# Altium PCB AVR最小系统板_电源线加粗.PcbDoc
Units mm, origin at the board's own origin, x right, y up, seen from the top; angles counter-clockwise.
Board outline 152.4 x 101.6 mm, 2 copper layers (Top Layer, Bottom Layer); 29 components, 54 nets, 170 pads, 0 vias.
Unrouted connection lines stored in the file: 1.
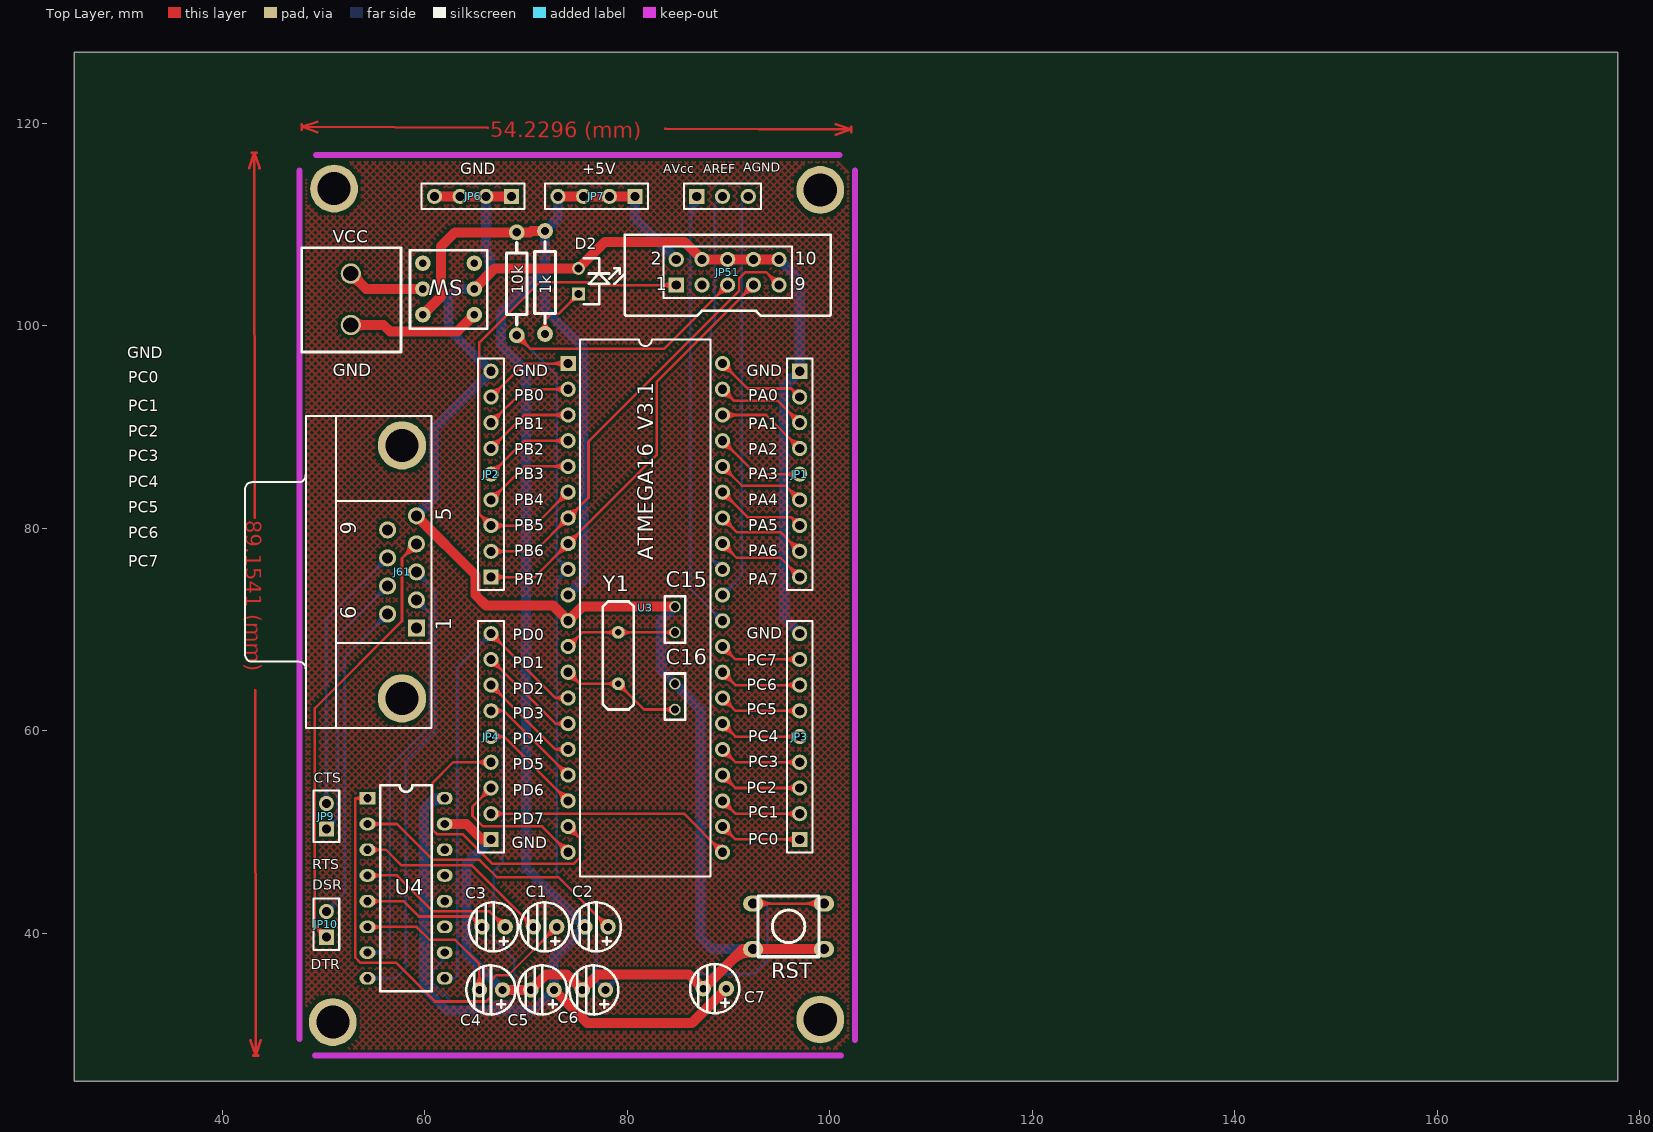
[diagram p0: Top Layer view]
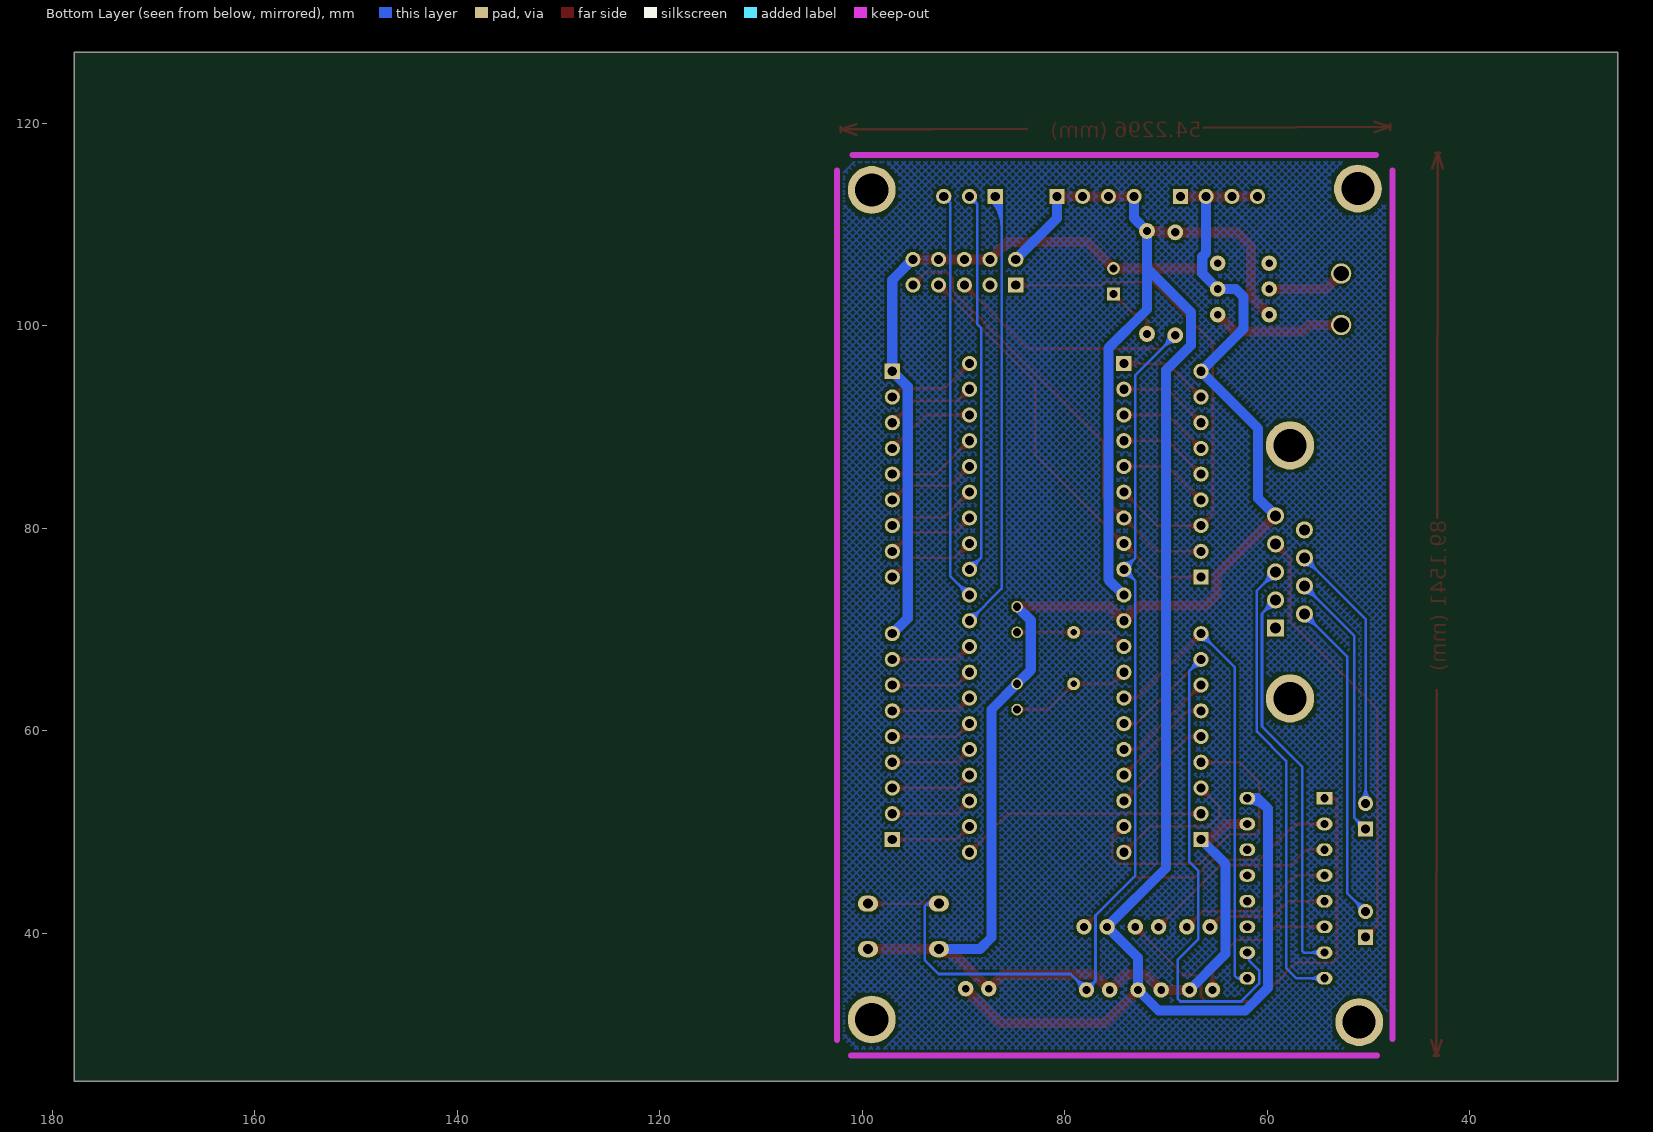
[diagram p1: Bottom Layer view, seen from below]

## Layer stack, top to bottom
Top Layer: signal copper 0.0356
Dielectric: dielectric 0.32, FR-4, Dk 4.8
Bottom Layer: signal copper 0.0356

## Board outline
25.4,25.4 177.8,25.4 177.8,127 25.4,127

## Design rules (kind name [scope] priority, off if disabled: settings)
Clearance [All] p1: gap=0.254
ComponentClearance [All] p1: gap=0.254 collisioncheckmode=0 verticalgap=0.254
PolygonConnect [All] p1: connectstyle=Relief reliefconductorwidth=0.254 reliefentries=4 polygonreliefangle="90 Angle"
RoutingVias [All] p1: holewidth=0.711 width=1.27 viastyle="Through Hole" minholewidth=0.711 minwidth=1.27 maxholewidth=0.711 maxwidth=1.27
SolderMaskExpansion [All] p1: expansion=0.102
TestPointUsage [All] p1: valid=0 allowmultiple=FALSE
Testpoint [All] p1: side=15 testpointundercomponent=TRUE minsize=1.016 maxsize=2.54 preferedsize=1.524 minholesize=0 maxholesize=1.016 preferedholesize=0.813 testpointgrid=0.025 style=1023 order=0123456789
Width Width_4 [InNet('GND')] p1: maxlimit=1 minlimit=1 preferedwidth=1
Width Width_3 [InNet('VCC')] p2: maxlimit=1 minlimit=1 preferedwidth=1
Width Width_2 [InNet('Net11_1')] p3: maxlimit=1 minlimit=1 preferedwidth=1
Width Width_1 [All] p4: maxlimit=0.254 minlimit=0.254 preferedwidth=0.254
Width [All] p5: maxlimit=0.254 minlimit=0.254 preferedwidth=0.254
17 further rules are at their usual default settings.

## Classes and differential pairs
component class Sheet1: 4/6 7/8 11 C1 C2 C3 C4 C5 C6 C7 C15 C16 D2 J61 JP1 JP2 JP3 JP4 JP5 key U3

## Components (designator, comment, footprint, x,y, rotation, side; value= is the part's Value field where it differs from the comment)
1k "4.7k" AXIAL0.4 71.882,109.347 r270 top (schematic designator R2)
10k "8.2k" AXIAL0.4 69.088,109.22 r270 top (schematic designator R1)
11 "power" DYDZ 53.848,104.648 r0 top
C1 "1uf" C-DJ-4 70.612,43.18 r180 top
C2 "1uf" C-DJ-4 75.692,43.18 r180 top
C3 "1uf" C-DJ-4 65.532,43.18 r180 top
C4 "1uf" C-DJ-4 65.278,36.957 r180 top
C5 "1uf" C-DJ-4 70.358,36.957 r180 top
C6 "10uf" C-DJ-4 75.438,36.957 r180 top
C7 "360u\15v" C-DJ-4 87.376,37.084 r180 top
C15 "15p" RAD0.3 84.709,69.215 r90 top
C16 "15p" RAD0.3 84.709,61.595 r90 top
D2 "LED" LED 75.692,105.156 r270 top
J61 "D Connector 9" DSUB1.385-2H9 48.26,75.692 r90 top
JP1 "" HDR1X9 97.028,95.504 r270 top
JP2 "" HDR1X9 66.548,75.184 r90 top
JP3 "" HDR1X9 97.028,49.276 r90 top
JP4 "" HDR1X9 66.548,49.276 r90 top
JP5 "" HDR1X3 86.868,112.776 r0 top
JP6 "" HDR1X4 68.58,112.776 r180 top
JP7 "" HDR1X4 80.772,112.776 r180 top
JP9 "" HDR1X2 50.292,50.292 r90 top
JP10 "Header 3" HDR1X2 50.292,39.624 r90 top
JP51 "download" HDR-2x5 89.916,104.14 r0 top
RST "Comment" an-6*6 102.108,35.56 r0 top
SW "KEY-33" key 65.532,103.632 r0 top (schematic designator RT)
U3 "ATmega16L-8PI" 40P6 81.788,72.136 r270 top
U4 "MAX232" DIP16 54.356,53.34 r0 top
Y1 "12M" CRYSTAL 80.137,67.183 r270 top

## Footprints (in the part's own frame and the unit in brackets; to place one, negate y for a bottom-side part, rotate by r counter-clockwise, add the part's x,y. Pads: shape width x height; smd on the part's side, far side on the other; paste and mask are expansions set on the pad)
40P6 [mm] "DIP; 40 Leads; Row Spacing 15.24 mm; Pitch 2.54 mm"
  rect 1.5x1.5 hole 0.9: 1(-24.13,-7.62)
  round 1.5 hole 0.9: 2(-21.59,-7.62) 3(-19.05,-7.62) 4(-16.51,-7.62) 5(-13.97,-7.62) 6(-11.43,-7.62) 7(-8.89,-7.62) 8(-6.35,-7.62) 9(-3.81,-7.62) 10(-1.27,-7.62) 11(1.27,-7.62) 12(3.81,-7.62) 13(6.35,-7.62) 14(8.89,-7.62) 15(11.43,-7.62) 16(13.97,-7.62) 17(16.51,-7.62) 18(19.05,-7.62) 19(21.59,-7.62) 20(24.13,-7.62) 21(24.13,7.62) 22(21.59,7.62) 23(19.05,7.62) 24(16.51,7.62) 25(13.97,7.62) 26(11.43,7.62) 27(8.89,7.62) 28(6.35,7.62) 29(3.81,7.62) 30(1.27,7.62) 31(-1.27,7.62) 32(-3.81,7.62) 33(-6.35,7.62) 34(-8.89,7.62) 35(-11.43,7.62) 36(-13.97,7.62) 37(-16.51,7.62) 38(-19.05,7.62) 39(-21.59,7.62) 40(-24.13,7.62)
  silkscreen extent -26.5,-6.45 26.5,6.45
an-6*6 [mm] "按键"
  oval 2x1.6 hole 1: 1(-9.675,7.381) 1(-2.675,7.381) 2(-9.675,2.881) 2(-2.675,2.881)
  silkscreen extent -9.17,2.13 -3.17,8.13
AXIAL0.4 [mil]
  round 62 hole 32: 1(-0.15,-0.04) 2(399.85,-0.04)
  silkscreen extent 40,-40 360,40
C-DJ-4 [mil] "电容4mm"
  round 60 hole 30: 1(-95,100) 2(-5,100)
  silkscreen extent -145,5 46,195
CRYSTAL [mil]
  round 50 hole 25: 1(-100,-40) 2(100,-40)
  silkscreen extent -220,-100 200,20
DIP16 [mil]
  rect 62x49.21 hole 32: 1(-0.15,-0.04)
  oval 62x49.21 hole 32: 2(-0.15,-100.04) 3(-0.15,-200.04) 4(-0.15,-300.04) 5(-0.15,-400.04) 6(-0.15,-500.04) 7(-0.15,-600.04) 8(-0.15,-700.04) 9(299.85,-700.04) 10(299.85,-600.04) 11(299.85,-500.04) 12(299.85,-400.04) 13(299.85,-300.04) 14(299.85,-200.04) 15(299.85,-100.04) 16(299.85,-0.04)
  silkscreen extent 50,-750 250,50
DSUB1.385-2H9 [mm] "Connector; D Subminiature; 9 Position; Right Angle; Pitch 1.385 mm"
  rect 1.69x1.69 hole 1.09: 1(-5.54,-10.92)
  round 1.69 hole 1.09: 2(-2.77,-10.92) 3(0,-10.92) 4(2.77,-10.92) 5(5.54,-10.92) 6(-4.155,-8.08) 7(-1.385,-8.08) 8(1.385,-8.08) 9(4.155,-8.08)
  round 4.76 hole 3.26: 10(-12.495,-9.5) 11(12.495,-9.5)
  silkscreen extent -15.4,-12.4 15.4,6
DYDZ [mm] "接线端子"
  round 2 hole 1.5: 1(-1.143,0.508) 2(-1.143,-4.572)
  silkscreen extent -5.97,-7.24 3.81,3.05
HDR1X2 [mm] "Connector; Header; 2 Position"
  rect 1.5x1.5 hole 0.9: 1(0,0)
  round 1.5 hole 0.9: 2(2.54,0)
  silkscreen extent -1.27,-1.27 3.81,1.27
HDR1X3 [mm] "Connector; Header; 3 Position"
  rect 1.5x1.5 hole 0.9: 1(0,0)
  round 1.5 hole 0.9: 2(2.54,0) 3(5.08,0)
  silkscreen extent -1.27,-1.27 6.35,1.27
HDR1X4 [mm] "Connector; Header; 4 Position"
  rect 1.5x1.5 hole 0.9: 1(0,0)
  round 1.5 hole 0.9: 2(2.54,0) 3(5.08,0) 4(7.62,0)
  silkscreen extent -1.27,-1.27 8.89,1.27
HDR1X9 [mm] "Connector; Header; 9 Position"
  rect 1.5x1.5 hole 0.9: 1(0,0)
  round 1.5 hole 0.9: 2(2.54,0) 3(5.08,0) 4(7.62,0) 5(10.16,0) 6(12.7,0) 7(15.24,0) 8(17.78,0) 9(20.32,0)
  silkscreen extent -1.27,-1.27 21.59,1.27
HDR-2x5 [mm] "下载口"
  rect 1.5x1.5 hole 0.9: 1(-5.08,-0.127)
  round 1.5 hole 0.9: 2(-5.08,2.413) 3(-2.54,-0.127) 4(-2.54,2.413) 5(0,-0.127) 6(0,2.413) 7(2.54,-0.127) 8(2.54,2.413) 9(5.08,-0.127) 10(5.08,2.413)
  silkscreen extent -10.16,-3.17 10.16,4.83
key [mil]
  round 60 hole 30: 0(-225,100) 1(-225,0) 2(-225,-100) 3(-25,-100) 4(-25,0) 5(-25,100)
  silkscreen extent -275,-155 25,150
LED [mil]
  rect 50x50 hole 32: 1(80,-20)
  round 50 hole 32: 2(-20,-20)
  silkscreen extent -60,0 120,160
RAD0.3 [mil]
  round 45 hole 32: 1(20,0) 2(120,0)
  silkscreen extent -20,-40 160,40

## Part data
1k 10k: library part RES2
C1 C2 C3 C4 C5 C6 C7: library part "CAPACITOR POL", "Capacitor"
C15 C16: library part CAP, "Capacitor"
J61: "Receptacle Assembly, 9 Position, Right Angle"
JP1 JP2 JP3 JP4: library part "Header 9", "Header, 9-Pin"
JP5: library part "Header 3", "Header, 3-Pin"
JP6 JP7: library part "Header 4", "Header, 4-Pin"
JP9 JP10: library part "Header 2", "Header, 2-Pin"
JP51: library part "Header 5X2", "Header, 5-Pin, Dual row"
U3: "8-Bit AVR Microcontroller with 16K Bytes of In-System Programmable Flash Memory"
Y1: library part CRYSTAL, "Crystal"

## Free pads (board coordinates)
  round 4.72 hole 3.267: 0(51.054,113.538) 1(99.06,113.411) 2(50.927,31.242) 3(99.06,31.496)

## Nets (pads, with @x,y where several pads share a name; then routed paths per layer and width w, separated by ;. In a path a pad name is that pad's centre, name@x,y a point inside that pad or via, vN(x,y) a via of type N, cw(c..) or ccw(c..) an arc to the next point about the centre after c; other vN are vias at no path point)
4: J61.4 JP10.1 | length 51.7
  Top Layer w0.254: JP10.1@49.669,39.624 ccw(c48.165,39.624) 49.228,40.688 ccw(c50.292,41.751) JP10.1@50.292,40.247 ; JP10.1@49.923,39.624 ccw(c49.032,39.624) 49.662,40.254 ccw(c50.292,40.884) JP10.1@50.292,39.993 ; JP10.1 49.149,40.767 49.149,62.23 57.76,70.841 57.76,77.042 J61.4 ; J61.4@58.462,78.462 cw(c56.729,78.462) 57.954,77.236 cw(c59.18,76.011) J61.4@59.18,77.744 ; J61.4@58.716,78.462 cw(c57.596,78.462) 58.388,77.67 cw(c59.18,76.878) J61.4@59.18,77.998
6: J61.6 JP10.2 | length 40.1
  Bottom Layer w0.254: JP10.2 52.121,43.993 52.121,67.318 J61.6 ; JP10.2@50.292,42.533 ccw(c50.292,43.424) 50.922,42.794 ccw(c51.552,42.164) JP10.2@50.661,42.164 ; JP10.2@50.292,42.787 ccw(c50.292,44.291) 51.356,43.228 ccw(c52.419,42.164) JP10.2@50.915,42.164 ; J61.6@55.622,71.537 cw(c53.889,71.537) 55.114,70.311 cw(c56.34,69.086) J61.6@56.34,70.819 ; J61.6@55.876,71.537 cw(c54.756,71.537) 55.548,70.745 cw(c56.34,69.953) J61.6@56.34,71.073
7: J61.7 JP9.1 | length 34.8
  Bottom Layer w0.254: JP9.1 51.435,51.435 51.435,69.402 J61.7 ; JP9.1@50.292,50.661 ccw(c50.292,51.552) 50.922,50.922 ccw(c51.552,50.292) JP9.1@50.661,50.292 ; JP9.1@50.292,50.915 ccw(c50.292,52.419) 51.356,51.356 ccw(c52.419,50.292) JP9.1@50.915,50.292 ; J61.7@55.622,74.307 cw(c53.889,74.307) 55.114,73.081 cw(c56.34,71.856) J61.7@56.34,73.589 ; J61.7@55.876,74.307 cw(c54.756,74.307) 55.548,73.515 cw(c56.34,72.723) J61.7@56.34,73.843
8: J61.8 JP9.2 | length 35
  Bottom Layer w0.254: JP9.2@49.851,53.273 ccw(c48.788,54.336) 50.292,54.336 ccw(c51.796,54.336) JP9.2@50.733,53.273 ; JP9.2@50.031,53.093 ccw(c49.401,53.723) 50.292,53.723 ccw(c51.183,53.723) JP9.2@50.553,53.093 ; JP9.2 50.292,71.029 J61.8 ; J61.8@55.622,77.077 cw(c53.889,77.077) 55.114,75.851 cw(c56.34,74.626) J61.8@56.34,76.359 ; J61.8@55.876,77.077 cw(c54.756,77.077) 55.548,76.285 cw(c56.34,75.493) J61.8@56.34,76.613
GND: 11.2 C4.1 C5.2 C6.2 C7.2 C15.2 C16.2 D2.2 J61.5 JP1.1 JP2.9 JP3.9 JP4.1 JP6.1 JP6.2 JP6.3 JP6.4 JP51.4 JP51.6 JP51.8 JP51.10 RST.2 SW.3 SW.4 U3.11 U4.15 | length 268.6
  Top Layer w1: 11.2 55.931,100.076 56.566,99.441 63.246,99.441 SW.3 ; 11.2@53.059,99.722 cw(c53.912,98.869) 53.912,100.076 cw(c53.912,101.283) 11.2@53.059,100.43 ; J61.5 65.024,75.388 65.024,73.406 66.04,72.39 72.644,72.39 U3.11 75.565,72.263 C15.2 ; JP6.4 JP6.3 JP6.2 JP6.1 ; U4.15 64.131,50.799 65.654,49.276 JP4.1 ; SW.4 66.929,105.664 D2.2 77.8,108.28 85.649,108.28 JP51.4 JP51.6 JP51.8 JP51.10 ; C4.1 C5.2 72.009,35.941 74.041,35.941 C6.2 77.089,35.941 86.106,35.941 C7.2 91.4,38.441 92.433,38.441 RST.2@99.433,38.441 ; 90.299,37.34 cw(c92.233,35.405) RST.2@92.233,38.141 ; 90.983,38.024 cw(c91.638,37.37) 92.087,38.179 ccw(c91.638,37.37) 90.983,38.024
  Bottom Layer w1: J61.5 60.909,82.961 60.909,89.865 JP2.9 62.357,99.695 62.357,102.87 63.119,103.632 SW.4 66.421,105.156 66.421,106.807 66.04,107.188 JP6.2 ; JP4.1 64.135,46.863 64.135,37.973 C4.1 ; C15.2 83.363,70.917 83.363,65.989 C16.2 87.238,62.114 87.238,39.594 88.392,38.441 RST.2@92.433,38.441 ; JP51.10 97.028,104.521 JP1.1 95.504,93.98 95.504,71.12 JP3.9
Net1_3: 10k.2 C6.1 JP51.5 RST.1 U3.9 | length 161.3
  Top Layer w0.254: 10k.2@69.087,98.403 cw(c69.087,96.809) 70.214,97.936 cw(c71.342,99.064) 10k.2@69.747,99.064 ; 10k.2@69.087,98.657 cw(c69.087,97.676) 69.781,98.37 cw(c70.475,99.064) 10k.2@69.493,99.064 ; 10k.2 70.437,97.714 83.617,97.714 JP51.5 ; JP51.5@89.293,104.013 cw(c87.789,104.013) 88.852,102.949 cw(c89.916,101.886) JP51.5@89.916,103.39 ; JP51.5@89.547,104.013 cw(c88.656,104.013) 89.286,103.383 cw(c89.916,102.753) JP51.5@89.916,103.644 ; RST.1@92.433,42.941 RST.1@99.433,42.941 ; RST.1@92.929,42.645 cw(c93.645,41.929) 93.645,42.941 cw(c93.645,43.952) RST.1@92.929,43.237 ; RST.1@93.109,42.465 cw(c94.258,41.316) 94.258,42.941 cw(c94.258,44.566) RST.1@93.109,43.417 ; RST.1@98.757,42.465 ccw(c97.608,41.316) 97.608,42.941 ccw(c97.608,44.566) RST.1@98.757,43.417 ; RST.1@98.937,42.645 ccw(c98.221,41.929) 98.221,42.941 ccw(c98.221,43.952) RST.1@98.937,43.237
  Bottom Layer w0.254: 10k.2@69.087,98.403 cw(c69.087,96.809) 70.214,97.936 cw(c71.342,99.064) 10k.2@69.747,99.064 ; 10k.2@69.087,98.657 cw(c69.087,97.676) 69.781,98.37 cw(c70.475,99.064) 10k.2@69.493,99.064 ; 10k.2 73.025,95.126 73.025,77.089 U3.9 73.025,74.803 73.025,45.72 76.962,41.783 76.962,35.306 ; U3.9@74.168,75.323 ccw(c74.168,73.819) 73.104,74.882 ccw(c72.041,75.946) 73.545,75.946 ccw(c72.041,75.946) 73.104,77.01 ccw(c74.168,78.073) U3.9@74.168,76.569 ; U3.9@74.168,75.577 ccw(c74.168,74.686) 73.538,75.316 ccw(c72.908,75.946) 73.799,75.946 ccw(c72.908,75.946) 73.538,76.576 ccw(c74.168,77.206) U3.9@74.168,76.315 ; C6.1@77.223,34.512 ccw(c76.307,34.65) 76.962,35.306 ; C6.1@77.756,35.045 cw(c77.618,35.961) 76.962,35.306 ; C6.1@77.851,34.798 ccw(c77.851,35.718) 78.501,35.067 ccw(c79.152,34.417) C6.1@78.232,34.417 ; C6.1@77.851,35.052 ccw(c77.851,36.585) 78.935,35.501 ccw(c80.019,34.417) C6.1@78.486,34.417 ; RST.1@92.433,42.941 93.559,42.941 ; RST.1@92.587,43.017 cw(c93.018,42.308) 93.605,42.895 ; RST.1@92.719,42.8 cw(c93.191,42.024) 93.833,42.666 ; 76.962,35.306 C6.1 79.426,35.992 92.456,35.992 93.828,37.363 93.828,42.672 93.559,42.941 ; 93.559,42.941 cw(c93.559,43.241) 93.273,43.148 ccw(c93.559,43.241) 93.559,42.941 ; 93.559,42.941 ccw(c93.559,42.641) 93.273,42.733 cw(c93.559,42.641) 93.559,42.941
Net11_1: 11.1 SW.1 | length 9.6
  Top Layer w1: 11.1@52.705,104.656 cw(c52.705,103.449) 53.559,104.302 cw(c54.412,105.156) 11.1@53.205,105.156 ; 11.1 54.229,103.632 SW.1
NetC1_1: C1.1 U4.1 | length 47.9
  Top Layer w0.254: U4.1@53.799,53.03 ccw(c53.162,52.528) 53.162,53.339 ; U4.1@53.799,53.648 cw(c53.162,54.15) 53.162,53.339 ; U4.1 53.162,53.339 ; C1.1@72.39,40.64 cw(c70.857,40.64) 71.941,39.556 cw(c73.025,38.472) C1.1@73.025,40.005 ; C1.1@72.644,40.64 cw(c71.724,40.64) 72.375,39.99 cw(c73.025,39.339) C1.1@73.025,40.259 ; C1.1 68.25,35.865 67.056,35.865 66.548,35.357 66.548,33.782 66.04,33.274 61.011,33.274 57.201,37.084 53.67,37.084 53.162,37.592 53.162,53.339
NetC1_2: C1.2 U4.3 | length 25.3
  Top Layer w0.254: U4.3 56.16,48.259 57.674,46.745 64.634,46.745 C1.2 ; U4.3@54.867,47.907 cw(c55.717,47.057) 55.717,48.259 cw(c55.717,49.461) U4.3@54.867,48.611 ; C1.2@70.104,40.64 ccw(c68.571,40.64) 69.655,41.724 ccw(c70.739,42.808) C1.2@70.739,41.275 ; C1.2@70.358,40.64 ccw(c69.438,40.64) 70.089,41.29 ccw(c70.739,41.941) C1.2@70.739,41.021
NetC2_1: C2.1 U4.2 | length 33.7
  Top Layer w0.254: U4.2 57.258,50.799 60.804,47.253 65.421,47.253 67.132,45.542 73.203,45.542 C2.1 ; U4.2@54.867,50.447 cw(c55.717,49.597) 55.717,50.799 cw(c55.717,52.001) U4.2@54.867,51.151 ; C2.1@77.47,40.64 ccw(c75.937,40.64) 77.021,41.724 ccw(c78.105,42.808) C2.1@78.105,41.275 ; C2.1@77.724,40.64 ccw(c76.804,40.64) 77.455,41.29 ccw(c78.105,41.941) C2.1@78.105,41.021
NetC3_1: C3.1 U4.4 | length 21.4
  Top Layer w0.254: U4.4 57.262,45.719 60.808,42.173 66.412,42.173 C3.1 ; U4.4@54.867,45.367 cw(c55.717,44.517) 55.717,45.719 cw(c55.717,46.921) U4.4@54.867,46.071 ; C3.1@67.31,40.64 ccw(c65.777,40.64) 66.861,41.724 ccw(c67.945,42.808) C3.1@67.945,41.275 ; C3.1@67.564,40.64 ccw(c66.644,40.64) 67.295,41.29 ccw(c67.945,41.941) C3.1@67.945,41.021
NetC3_2: C3.2 U4.5 | length 17.8
  Top Layer w0.254: U4.5 57.903,43.179 59.417,41.665 64.634,41.665 ; U4.5@54.867,42.827 cw(c55.717,41.977) 55.717,43.179 cw(c55.717,44.381) U4.5@54.867,43.531 ; C3.2@65.025,40.666 ccw(c63.689,40.72) 64.634,41.665 ; C3.2@65.278,40.655 ccw(c64.477,40.688) 65.044,41.255 ccw(c65.611,41.822) C3.2@65.644,41.021 ; C3.2@65.633,41.274 cw(c65.579,42.61) 64.634,41.665 ; C3.2 64.634,41.665
NetC4_2: C4.2 U4.6 | length 20.9
  Top Layer w0.254: U4.6 59.208,40.639 60.477,39.37 62.992,39.37 65.405,36.957 C4.2 ; U4.6@54.867,40.287 cw(c55.717,39.437) 55.717,40.639 cw(c55.717,41.841) U4.6@54.867,40.991 ; C4.2@64.956,34.866 ccw(c63.872,35.95) 65.405,35.95 ccw(c66.938,35.95) C4.2@65.854,34.866 ; C4.2@65.136,34.686 ccw(c64.485,35.337) 65.405,35.337 ccw(c66.325,35.337) C4.2@65.674,34.686
NetC15_1: C15.1 U3.12 Y1.1 | length 20.4
  Top Layer w0.254: U3.12 75.565,69.723 Y1.1 C15.1 ; U3.12@74.168,68.695 ccw(c74.168,69.586) 74.798,68.956 ccw(c75.428,68.326) U3.12@74.537,68.326 ; U3.12@74.168,68.949 ccw(c74.168,70.453) 75.232,69.39 ccw(c76.295,68.326) U3.12@74.791,68.326 ; Y1.1@78.762,69.364 ccw(c77.895,68.497) 77.895,69.723 ccw(c77.895,70.949) Y1.1@78.762,70.082 ; Y1.1@79.48,69.364 cw(c80.347,68.497) 80.347,69.723 cw(c80.347,70.949) Y1.1@79.48,70.082 ; C15.1@84.395,69.409 ccw(c83.636,68.65) 83.636,69.723 ccw(c83.636,70.796) C15.1@84.395,70.037
NetC16_1: C16.1 U3.13 Y1.2 | length 21.4
  Top Layer w0.254: U3.13@74.168,65.163 cw(c74.168,63.659) 75.232,64.722 cw(c76.295,65.786) U3.13@74.791,65.786 ; U3.13@74.168,65.417 cw(c74.168,64.526) 74.798,65.156 cw(c75.428,65.786) U3.13@74.537,65.786 ; U3.13 75.311,64.643 Y1.2 81.661,62.103 C16.1 ; Y1.2@78.762,64.284 ccw(c77.895,63.417) 77.895,64.643 ccw(c77.895,65.869) Y1.2@78.762,65.002 ; Y1.2@79.121,64.135 cw(c79.121,62.909) 79.988,63.776 cw(c80.855,64.643) Y1.2@79.629,64.643 ; C16.1@84.395,61.789 ccw(c83.636,61.03) 83.636,62.103 ccw(c83.636,63.176) C16.1@84.395,62.417
NetD2_1: 1k.2 D2.1 | length 10.9
  Top Layer w0.254: 1k.2@71.463,99.702 ccw(c70.742,100.584) 71.881,100.584 ; 1k.2@71.624,99.505 ccw(c71.18,100.048) 71.881,100.048 ccw(c72.582,100.048) 1k.2@72.138,99.505 ; 1k.2 71.881,100.584 ; 1k.2@72.299,99.702 cw(c73.02,100.584) 71.881,100.584 ; D2.1@74.676,103.124 cw(c73.45,103.124) 74.317,102.257 cw(c75.184,101.39) D2.1@75.184,102.616 ; D2.1 73.228,101.168 72.465,101.168 71.881,100.584
NetJ61_2: J61.2 U4.7 | length 45.5
  Bottom Layer w0.254: U4.7 56.388,38.099 56.566,38.277 56.566,56.471 60.521,60.427 60.521,71.581 J61.2 ; U4.7@54.867,37.747 cw(c55.717,36.897) 55.717,38.099 cw(c55.717,39.301) U4.7@54.867,38.451 ; J61.2@59.18,72.204 cw(c59.18,70.471) 60.406,71.696 cw(c61.631,72.922) J61.2@59.898,72.922 ; J61.2@59.18,72.458 cw(c59.18,71.338) 59.972,72.13 cw(c60.764,72.922) J61.2@59.644,72.922
NetJ61_3: J61.3 U4.8 | length 51.7
  Bottom Layer w0.254: U4.8 57.124,35.559 58.141,36.576 58.141,57.04 61.029,59.928 61.029,73.843 J61.3 ; U4.8@54.867,35.207 cw(c55.717,34.357) 55.717,35.559 cw(c55.717,36.761) U4.8@54.867,35.911 ; J61.3@59.18,74.974 cw(c59.18,73.241) 60.406,74.466 cw(c61.631,75.692) J61.3@59.898,75.692 ; J61.3@59.18,75.228 cw(c59.18,74.108) 59.972,74.9 cw(c60.764,75.692) J61.3@59.644,75.692
NetJP1_3: JP1.3 U3.39 | length 16.5
  Top Layer w0.254: U3.39@89.408,93.103 cw(c89.408,91.599) 90.472,92.662 cw(c91.535,93.726) U3.39@90.031,93.726 ; U3.39@89.408,93.357 cw(c89.408,92.466) 90.038,93.096 cw(c90.668,93.726) U3.39@89.777,93.726 ; U3.39 90.551,92.583 94.869,92.583 JP1.3 ; JP1.3@96.405,90.424 ccw(c94.901,90.424) 95.964,91.488 ccw(c97.028,92.551) JP1.3@97.028,91.047 ; JP1.3@96.659,90.424 ccw(c95.768,90.424) 96.398,91.054 ccw(c97.028,91.684) JP1.3@97.028,90.793
NetJP1_4: JP1.4 U3.38 | length 16.5
  Top Layer w0.254: U3.38 93.726,91.186 JP1.4 ; U3.38@89.669,90.925 cw(c90.299,90.295) 90.299,91.186 cw(c90.299,92.077) U3.38@89.669,91.447 ; U3.38@89.849,90.745 cw(c90.912,89.682) 90.912,91.186 cw(c90.912,92.69) U3.38@89.849,91.627 ; JP1.4@96.405,87.884 ccw(c94.901,87.884) 95.964,88.948 ccw(c97.028,90.011) JP1.4@97.028,88.507 ; JP1.4@96.659,87.884 ccw(c95.768,87.884) 96.398,88.514 ccw(c97.028,89.144) JP1.4@97.028,88.253
NetJP1_5: JP1.5 U3.37 | length 16.5
  Top Layer w0.254: U3.37@89.408,88.023 cw(c89.408,86.519) 90.472,87.582 cw(c91.535,88.646) U3.37@90.031,88.646 ; U3.37@89.408,88.277 cw(c89.408,87.386) 90.038,88.016 cw(c90.668,88.646) U3.37@89.777,88.646 ; U3.37 92.71,85.344 JP1.5 ; JP1.5@96.587,84.903 ccw(c95.524,83.84) 95.524,85.344 ccw(c95.524,86.848) JP1.5@96.587,85.785 ; JP1.5@96.767,85.083 ccw(c96.137,84.453) 96.137,85.344 ccw(c96.137,86.235) JP1.5@96.767,85.605
NetJP1_6: JP1.6 U3.36 | length 16.5
  Top Layer w0.254: U3.36@89.408,85.483 cw(c89.408,83.979) 90.472,85.042 cw(c91.535,86.106) U3.36@90.031,86.106 ; U3.36@89.408,85.737 cw(c89.408,84.846) 90.038,85.476 cw(c90.668,86.106) U3.36@89.777,86.106 ; U3.36 91.313,84.201 95.631,84.201 JP1.6 ; JP1.6@96.405,82.804 ccw(c94.901,82.804) 95.964,83.868 ccw(c97.028,84.931) JP1.6@97.028,83.427 ; JP1.6@96.659,82.804 ccw(c95.768,82.804) 96.398,83.434 ccw(c97.028,84.064) JP1.6@97.028,83.173
NetJP1_7: JP1.7 U3.35 | length 15.9
  Top Layer w0.254: U3.35@89.408,82.943 cw(c89.408,81.439) 90.472,82.502 cw(c91.535,83.566) U3.35@90.031,83.566 ; U3.35@89.408,83.197 cw(c89.408,82.306) 90.038,82.936 cw(c90.668,83.566) U3.35@89.777,83.566 ; U3.35 91.872,81.102 96.19,81.102 ; JP1.7 96.19,81.102 ; 96.19,81.102 cw(c95.613,80.525) 96.415,80.377 ccw(c95.613,80.525) 96.19,81.102 ; 96.19,81.102 ccw(c96.767,81.679) 96.915,80.877 cw(c96.767,81.679) 96.19,81.102
NetJP1_8: JP1.8 U3.34 | length 16.5
  Top Layer w0.254: U3.34@89.408,80.403 cw(c89.408,78.899) 90.472,79.962 cw(c91.535,81.026) U3.34@90.031,81.026 ; U3.34@89.408,80.657 cw(c89.408,79.766) 90.038,80.396 cw(c90.668,81.026) U3.34@89.777,81.026 ; U3.34 90.805,79.629 95.123,79.629 JP1.8 ; JP1.8@96.405,77.724 ccw(c94.901,77.724) 95.964,78.788 ccw(c97.028,79.851) JP1.8@97.028,78.347 ; JP1.8@96.659,77.724 ccw(c95.768,77.724) 96.398,78.354 ccw(c97.028,78.984) JP1.8@97.028,78.093
NetJP1_9: JP1.9 U3.33 | length 16.5
  Top Layer w0.254: U3.33@89.408,77.863 cw(c89.408,76.359) 90.472,77.422 cw(c91.535,78.486) U3.33@90.031,78.486 ; U3.33@89.408,78.117 cw(c89.408,77.226) 90.038,77.856 cw(c90.668,78.486) U3.33@89.777,78.486 ; U3.33 90.805,77.089 95.123,77.089 JP1.9 ; JP1.9@96.405,75.184 ccw(c94.901,75.184) 95.964,76.248 ccw(c97.028,77.311) JP1.9@97.028,75.807 ; JP1.9@96.659,75.184 ccw(c95.768,75.184) 96.398,75.814 ccw(c97.028,76.444) JP1.9@97.028,75.553
NetJP2_1: JP2.1 JP51.7 U3.8 | length 57.1
  Top Layer w0.254: JP2.1 70.866,75.184 U3.8 82.906,87.224 82.906,94.463 JP51.7 ; JP2.1@66.809,74.923 cw(c67.439,74.293) 67.439,75.184 cw(c67.439,76.075) JP2.1@66.809,75.445 ; JP2.1@66.989,74.743 cw(c68.052,73.68) 68.052,75.184 cw(c68.052,76.688) JP2.1@66.989,75.625 ; U3.8@73.545,78.486 cw(c72.041,78.486) 73.104,77.422 cw(c74.168,76.359) U3.8@74.168,77.863 ; U3.8@73.799,78.486 cw(c72.908,78.486) 73.538,77.856 cw(c74.168,77.226) U3.8@74.168,78.117 ; U3.8@74.168,78.855 ccw(c74.168,79.746) 74.798,79.116 ccw(c75.428,78.486) U3.8@74.537,78.486 ; U3.8@74.168,79.109 ccw(c74.168,80.613) 75.232,79.55 ccw(c76.295,78.486) U3.8@74.791,78.486 ; JP51.7@91.833,104.013 cw(c90.329,104.013) 91.392,102.949 cw(c92.456,101.886) JP51.7@92.456,103.39 ; JP51.7@92.087,104.013 cw(c91.196,104.013) 91.826,103.383 cw(c92.456,102.753) JP51.7@92.456,103.644
NetJP2_2: JP2.2 JP51.9 U3.7 | length 59.4
  Top Layer w0.254: JP2.2 70.866,77.724 U3.7 76.175,83.033 76.175,88.57 91.047,103.442 91.047,104.648 91.682,105.283 93.726,105.283 JP51.9 ; JP2.2@66.809,77.463 cw(c67.439,76.833) 67.439,77.724 cw(c67.439,78.615) JP2.2@66.809,77.985 ; JP2.2@66.989,77.283 cw(c68.052,76.22) 68.052,77.724 cw(c68.052,79.228) JP2.2@66.989,78.165 ; U3.7@73.545,81.026 cw(c72.041,81.026) 73.104,79.962 cw(c74.168,78.899) U3.7@74.168,80.403 ; U3.7@73.799,81.026 cw(c72.908,81.026) 73.538,80.396 cw(c74.168,79.766) U3.7@74.168,80.657 ; U3.7@74.168,81.395 ccw(c74.168,82.286) 74.798,81.656 ccw(c75.428,81.026) U3.7@74.537,81.026 ; U3.7@74.168,81.649 ccw(c74.168,83.153) 75.232,82.09 ccw(c76.295,81.026) U3.7@74.791,81.026 ; JP51.9@94.373,104.013 ccw(c92.869,104.013) 93.932,105.077 ccw(c94.996,106.14) JP51.9@94.996,104.636 ; JP51.9@94.627,104.013 ccw(c93.736,104.013) 94.366,104.643 ccw(c94.996,105.273) JP51.9@94.996,104.382
NetJP2_3: JP2.3 JP51.1 U3.6 | length 64.6
  Top Layer w0.254: JP2.3@65.925,80.264 ccw(c64.421,80.264) 65.484,81.328 ccw(c66.548,82.391) JP2.3@66.548,80.887 ; JP2.3@66.179,80.264 ccw(c65.288,80.264) 65.918,80.894 ccw(c66.548,81.524) JP2.3@66.548,80.633 ; JP2.3@66.809,80.003 cw(c67.439,79.373) 67.439,80.264 cw(c67.439,81.155) JP2.3@66.809,80.525 ; JP2.3@66.989,79.823 cw(c68.052,78.76) 68.052,80.264 cw(c68.052,81.768) JP2.3@66.989,80.705 ; U3.6@73.545,83.566 cw(c72.041,83.566) 73.104,82.502 cw(c74.168,81.439) U3.6@74.168,82.943 ; U3.6@73.799,83.566 cw(c72.908,83.566) 73.538,82.936 cw(c74.168,82.306) U3.6@74.168,83.197 ; U3.6 70.866,80.264 JP2.3 65.405,81.407 65.405,98.349 71.349,104.292 76.124,104.292 76.403,104.013 JP51.1 ; JP51.1@84.395,103.572 ccw(c83.332,102.509) 83.332,104.013 ccw(c83.332,105.517) JP51.1@84.395,104.454 ; JP51.1@84.575,103.752 ccw(c83.945,103.122) 83.945,104.013 ccw(c83.945,104.904) JP51.1@84.575,104.274
NetJP2_4: JP2.4 U3.5 | length 16.5
  Top Layer w0.254: JP2.4 69.85,86.106 U3.5 ; JP2.4@66.548,83.173 ccw(c66.548,84.064) 67.178,83.434 ccw(c67.808,82.804) JP2.4@66.917,82.804 ; JP2.4@66.548,83.427 ccw(c66.548,84.931) 67.612,83.868 ccw(c68.675,82.804) JP2.4@67.171,82.804 ; U3.5@73.727,85.665 ccw(c72.664,84.602) 72.664,86.106 ccw(c72.664,87.61) U3.5@73.727,86.547 ; U3.5@73.907,85.845 ccw(c73.277,85.215) 73.277,86.106 ccw(c73.277,86.997) U3.5@73.907,86.367
NetJP2_5: JP2.5 U3.4 | length 16.5
  Top Layer w0.254: JP2.5 69.85,88.646 U3.4 ; JP2.5@66.548,85.713 ccw(c66.548,86.604) 67.178,85.974 ccw(c67.808,85.344) JP2.5@66.917,85.344 ; JP2.5@66.548,85.967 ccw(c66.548,87.471) 67.612,86.408 ccw(c68.675,85.344) JP2.5@67.171,85.344 ; U3.4@73.727,88.205 ccw(c72.664,87.142) 72.664,88.646 ccw(c72.664,90.15) U3.4@73.727,89.087 ; U3.4@73.907,88.385 ccw(c73.277,87.755) 73.277,88.646 ccw(c73.277,89.537) U3.4@73.907,88.907
NetJP2_6: JP2.6 U3.3 | length 16.5
  Top Layer w0.254: JP2.6 69.85,91.186 U3.3 ; JP2.6@66.548,88.253 ccw(c66.548,89.144) 67.178,88.514 ccw(c67.808,87.884) JP2.6@66.917,87.884 ; JP2.6@66.548,88.507 ccw(c66.548,90.011) 67.612,88.948 ccw(c68.675,87.884) JP2.6@67.171,87.884 ; U3.3@73.727,90.745 ccw(c72.664,89.682) 72.664,91.186 ccw(c72.664,92.69) U3.3@73.727,91.627 ; U3.3@73.907,90.925 ccw(c73.277,90.295) 73.277,91.186 ccw(c73.277,92.077) U3.3@73.907,91.447
NetJP2_7: JP2.7 U3.2 | length 16.5
  Top Layer w0.254: JP2.7 69.85,93.726 U3.2 ; JP2.7@66.548,90.793 ccw(c66.548,91.684) 67.178,91.054 ccw(c67.808,90.424) JP2.7@66.917,90.424 ; JP2.7@66.548,91.047 ccw(c66.548,92.551) 67.612,91.488 ccw(c68.675,90.424) JP2.7@67.171,90.424 ; U3.2@73.727,93.285 ccw(c72.664,92.222) 72.664,93.726 ccw(c72.664,95.23) U3.2@73.727,94.167 ; U3.2@73.907,93.465 ccw(c73.277,92.835) 73.277,93.726 ccw(c73.277,94.617) U3.2@73.907,93.987
NetJP2_8: JP2.8 U3.1 | length 16.5
  Top Layer w0.254: JP2.8 69.85,96.266 U3.1 ; JP2.8@66.548,93.333 ccw(c66.548,94.224) 67.178,93.594 ccw(c67.808,92.964) JP2.8@66.917,92.964 ; JP2.8@66.548,93.587 ccw(c66.548,95.091) 67.612,94.028 ccw(c68.675,92.964) JP2.8@67.171,92.964 ; U3.1@73.727,95.825 ccw(c72.664,94.762) 72.664,96.266 ccw(c72.664,97.77) U3.1@73.727,96.707 ; U3.1@73.907,96.005 ccw(c73.277,95.375) 73.277,96.266 ccw(c73.277,97.157) U3.1@73.907,96.527
NetJP3_2: JP3.2 U3.23 | length 15.7
  Top Layer w0.254: U3.23@89.408,52.463 cw(c89.408,50.959) 90.472,52.022 cw(c91.535,53.086) U3.23@90.031,53.086 ; U3.23@89.408,52.717 cw(c89.408,51.826) 90.038,52.456 cw(c90.668,53.086) U3.23@89.777,53.086 ; U3.23 90.678,51.816 JP3.2 ; JP3.2@96.587,51.375 ccw(c95.524,50.312) 95.524,51.816 ccw(c95.524,53.32) JP3.2@96.587,52.257 ; JP3.2@96.767,51.555 ccw(c96.137,50.925) 96.137,51.816 ccw(c96.137,52.707) JP3.2@96.767,52.077
NetJP3_3: JP3.3 U3.24 | length 15.7
  Top Layer w0.254: U3.24@89.408,55.003 cw(c89.408,53.499) 90.472,54.562 cw(c91.535,55.626) U3.24@90.031,55.626 ; U3.24@89.408,55.257 cw(c89.408,54.366) 90.038,54.996 cw(c90.668,55.626) U3.24@89.777,55.626 ; U3.24 90.678,54.356 JP3.3 ; JP3.3@96.587,53.915 ccw(c95.524,52.852) 95.524,54.356 ccw(c95.524,55.86) JP3.3@96.587,54.797 ; JP3.3@96.767,54.095 ccw(c96.137,53.465) 96.137,54.356 ccw(c96.137,55.247) JP3.3@96.767,54.617
NetJP3_4: JP3.4 U3.25 | length 15.7
  Top Layer w0.254: U3.25@89.408,57.543 cw(c89.408,56.039) 90.472,57.102 cw(c91.535,58.166) U3.25@90.031,58.166 ; U3.25@89.408,57.797 cw(c89.408,56.906) 90.038,57.536 cw(c90.668,58.166) U3.25@89.777,58.166 ; U3.25 90.678,56.896 JP3.4 ; JP3.4@96.587,56.455 ccw(c95.524,55.392) 95.524,56.896 ccw(c95.524,58.4) JP3.4@96.587,57.337 ; JP3.4@96.767,56.635 ccw(c96.137,56.005) 96.137,56.896 ccw(c96.137,57.787) JP3.4@96.767,57.157
NetJP3_5: JP3.5 U3.26 | length 15.7
  Top Layer w0.254: U3.26@89.408,60.083 cw(c89.408,58.579) 90.472,59.642 cw(c91.535,60.706) U3.26@90.031,60.706 ; U3.26@89.408,60.337 cw(c89.408,59.446) 90.038,60.076 cw(c90.668,60.706) U3.26@89.777,60.706 ; U3.26 90.678,59.436 JP3.5 ; JP3.5@96.587,58.995 ccw(c95.524,57.932) 95.524,59.436 ccw(c95.524,60.94) JP3.5@96.587,59.877 ; JP3.5@96.767,59.175 ccw(c96.137,58.545) 96.137,59.436 ccw(c96.137,60.327) JP3.5@96.767,59.697
NetJP3_6: JP3.6 U3.27 | length 15.7
  Top Layer w0.254: U3.27@89.408,62.623 cw(c89.408,61.119) 90.472,62.182 cw(c91.535,63.246) U3.27@90.031,63.246 ; U3.27@89.408,62.877 cw(c89.408,61.986) 90.038,62.616 cw(c90.668,63.246) U3.27@89.777,63.246 ; U3.27 90.678,61.976 JP3.6 ; JP3.6@96.587,61.535 ccw(c95.524,60.472) 95.524,61.976 ccw(c95.524,63.48) JP3.6@96.587,62.417 ; JP3.6@96.767,61.715 ccw(c96.137,61.085) 96.137,61.976 ccw(c96.137,62.867) JP3.6@96.767,62.237
NetJP3_7: JP3.7 U3.28 | length 15.7
  Top Layer w0.254: U3.28@89.408,65.163 cw(c89.408,63.659) 90.472,64.722 cw(c91.535,65.786) U3.28@90.031,65.786 ; U3.28@89.408,65.417 cw(c89.408,64.526) 90.038,65.156 cw(c90.668,65.786) U3.28@89.777,65.786 ; U3.28 90.678,64.516 JP3.7 ; JP3.7@96.587,64.075 ccw(c95.524,63.012) 95.524,64.516 ccw(c95.524,66.02) JP3.7@96.587,64.957 ; JP3.7@96.767,64.255 ccw(c96.137,63.625) 96.137,64.516 ccw(c96.137,65.407) JP3.7@96.767,64.777
NetJP4_2: JP4.2 U3.21 | length 32
  Top Layer w0.254: JP4.2 85.598,51.816 U3.21 ; JP4.2@66.809,51.555 cw(c67.439,50.925) 67.439,51.816 cw(c67.439,52.707) JP4.2@66.809,52.077 ; JP4.2@66.989,51.375 cw(c68.052,50.312) 68.052,51.816 cw(c68.052,53.32) JP4.2@66.989,52.257 ; U3.21@88.785,48.006 ccw(c87.281,48.006) 88.344,49.07 ccw(c89.408,50.133) U3.21@89.408,48.629 ; U3.21@89.039,48.006 ccw(c88.148,48.006) 88.778,48.636 ccw(c89.408,49.266) U3.21@89.408,48.375
NetJP4_3: JP4.3 U3.20 | length 22
  Top Layer w0.254: JP4.3@65.925,54.356 cw(c64.421,54.356) 65.484,53.292 cw(c66.548,52.229) JP4.3@66.548,53.733 ; JP4.3@66.179,54.356 cw(c65.288,54.356) 65.918,53.726 cw(c66.548,53.096) JP4.3@66.548,53.987 ; JP4.3 64.719,52.527 64.719,51.587 65.735,50.571 71.603,50.571 U3.20 ; U3.20@73.545,48.006 ccw(c72.041,48.006) 73.104,49.07 ccw(c74.168,50.133) U3.20@74.168,48.629 ; U3.20@73.799,48.006 ccw(c72.908,48.006) 73.538,48.636 ccw(c74.168,49.266) U3.20@74.168,48.375
NetJP4_4: JP4.4 U3.19 | length 38.5
  Top Layer w0.254: JP4.4@66.107,56.455 ccw(c65.044,55.392) 65.044,56.896 ccw(c65.044,58.4) JP4.4@66.107,57.337 ; JP4.4@66.287,56.635 ccw(c65.657,56.005) 65.657,56.896 ccw(c65.657,57.787) JP4.4@66.287,57.157 ; JP4.4 62.814,56.896 60.782,54.864 60.782,50.225 61.214,49.793 63.745,49.793 66.675,46.863 74.676,46.863 75.311,47.498 75.311,49.403 U3.19 ; U3.19@74.168,49.923 cw(c74.168,48.419) 75.232,49.482 cw(c76.295,50.546) U3.19@74.791,50.546 ; U3.19@74.168,50.177 cw(c74.168,49.286) 74.798,49.916 cw(c75.428,50.546) U3.19@74.537,50.546
NetJP4_5: JP4.5 U3.18 | length 16.9
  Top Layer w0.254: JP4.5 67.818,59.436 ; JP4.5@66.84,59.21 cw(c67.3,58.854) 67.3,59.436 cw(c67.3,60.018) JP4.5@66.84,59.662 ; JP4.5@67.041,59.055 cw(c67.818,58.453) 67.818,59.436 ; JP4.5@67.041,59.817 ccw(c67.818,60.419) 67.818,59.436 ; U3.18@73.545,53.086 ccw(c72.041,53.086) 73.104,54.15 ccw(c74.168,55.213) U3.18@74.168,53.709 ; U3.18@73.799,53.086 ccw(c72.908,53.086) 73.538,53.716 ccw(c74.168,54.346) U3.18@74.168,53.455 ; U3.18 67.818,59.436
NetJP4_6: JP4.6 U3.17 | length 16.9
  Top Layer w0.254: JP4.6 67.818,61.976 ; JP4.6@66.84,61.75 cw(c67.3,61.394) 67.3,61.976 cw(c67.3,62.558) JP4.6@66.84,62.202 ; JP4.6@67.041,61.595 cw(c67.818,60.993) 67.818,61.976 ; JP4.6@67.041,62.357 ccw(c67.818,62.959) 67.818,61.976 ; U3.17@73.545,55.626 ccw(c72.041,55.626) 73.104,56.69 ccw(c74.168,57.753) U3.17@74.168,56.249 ; U3.17@73.799,55.626 ccw(c72.908,55.626) 73.538,56.256 ccw(c74.168,56.886) U3.17@74.168,55.995 ; U3.17 67.818,61.976
NetJP4_7: JP4.7 U3.16 | length 16.9
  Top Layer w0.254: JP4.7@66.548,63.893 cw(c66.548,62.389) 67.612,63.452 cw(c68.675,64.516) JP4.7@67.171,64.516 ; JP4.7@66.548,64.147 cw(c66.548,63.256) 67.178,63.886 cw(c67.808,64.516) JP4.7@66.917,64.516 ; JP4.7 72.898,58.166 ; U3.16@73.675,57.785 ccw(c72.898,57.183) 72.898,58.166 ; U3.16@73.675,58.547 cw(c72.898,59.149) 72.898,58.166 ; U3.16@73.876,57.94 ccw(c73.416,57.584) 73.416,58.166 ccw(c73.416,58.748) U3.16@73.876,58.392 ; U3.16 72.898,58.166
NetJP4_8: JP4.8 U3.15 U4.10 | length 69.9
  Top Layer w0.254: JP4.8@66.548,66.433 cw(c66.548,64.929) 67.612,65.992 cw(c68.675,67.056) JP4.8@67.171,67.056 ; JP4.8@66.548,66.687 cw(c66.548,65.796) 67.178,66.426 cw(c67.808,67.056) JP4.8@66.917,67.056 ; JP4.8 72.898,60.706 ; U3.15@73.675,60.325 ccw(c72.898,59.723) 72.898,60.706 ; U3.15@73.675,61.087 cw(c72.898,61.689) 72.898,60.706 ; U3.15@73.876,60.48 ccw(c73.416,60.124) 73.416,60.706 ccw(c73.416,61.288) U3.15@73.876,60.932 ; U3.15 72.898,60.706
  Bottom Layer w0.254: U4.10 61.798,38.099 61.798,37.338 ; JP4.8@66.548,66.433 cw(c66.548,64.929) 67.612,65.992 cw(c68.675,67.056) JP4.8@67.171,67.056 ; JP4.8@66.548,66.687 cw(c66.548,65.796) 67.178,66.426 cw(c67.808,67.056) JP4.8@66.917,67.056 ; JP4.8 67.691,65.913 67.691,47.041 66.802,46.152 66.802,39.446 68.834,37.414 68.834,33.528 68.58,33.274 62.582,33.274 60.804,35.052 60.804,36.344 61.798,37.338 ; 61.798,37.338 cw(c62.123,37.338) 61.999,37.639 ccw(c62.123,37.338) 61.798,37.338 ; 61.798,37.338 ccw(c61.458,37.338) 61.601,37.647 cw(c61.458,37.338) 61.798,37.338
NetJP5_1: JP5.1 U3.30 | length 57.2
  Bottom Layer w0.254: 86.233,109.739 cw(c89.905,109.739) JP5.1@87.309,112.335 ; 86.233,110.352 cw(c89.292,110.352) JP5.1@87.129,112.515 ; 86.233,110.965 cw(c88.679,110.965) JP5.1@86.949,112.695 ; 86.233,111.579 cw(c88.065,111.579) JP5.1@86.77,112.874 ; JP5.1@86.233,112.192 cw(c87.452,112.192) JP5.1@86.59,113.054 ; JP5.1 86.233,112.776 86.233,74.041 U3.30 ; U3.30@88.785,70.866 ccw(c87.281,70.866) 88.344,71.93 ccw(c89.408,72.993) U3.30@89.408,71.489 ; U3.30@89.039,70.866 ccw(c88.148,70.866) 88.778,71.496 ccw(c89.408,72.126) U3.30@89.408,71.235
NetJP5_2: JP5.2 U3.32 | length 44.1
  Bottom Layer w0.254: U3.32@88.785,75.946 ccw(c87.281,75.946) 88.344,77.01 ccw(c89.408,78.073) U3.32@89.408,76.569 ; U3.32@89.039,75.946 ccw(c88.148,75.946) 88.778,76.576 ccw(c89.408,77.206) U3.32@89.408,76.315 ; U3.32 88.265,77.089 88.265,99.771 88.646,100.152 88.646,112.014 ; JP5.2 88.646,112.014 ; 88.646,112.014 cw(c89.085,111.575) 89.246,112.174 ccw(c89.085,111.575) 88.646,112.014 ; 88.646,112.014 ccw(c88.207,112.453) 88.806,112.614 cw(c88.207,112.453) 88.646,112.014
NetJP5_3: JP5.3 U3.31 | length 45.8
  Bottom Layer w0.254: U3.31 91.313,75.311 91.313,112.141 ; U3.31@89.408,73.775 ccw(c89.408,74.666) 90.038,74.036 ccw(c90.668,73.406) U3.31@89.777,73.406 ; U3.31@89.408,74.029 ccw(c89.408,75.533) 90.472,74.47 ccw(c91.535,73.406) U3.31@90.031,73.406 ; JP5.3 91.313,112.141 ; 91.313,112.141 cw(c91.55,111.904) 91.69,112.209 ccw(c91.55,111.904) 91.313,112.141 ; 91.313,112.141 ccw(c91.076,112.378) 91.381,112.518 cw(c91.076,112.378) 91.313,112.141
PA0: JP1.2 U3.40 | length 15.9
  Top Layer w0.254: U3.40@89.408,95.643 cw(c89.408,94.139) 90.472,95.202 cw(c91.535,96.266) U3.40@90.031,96.266 ; U3.40@89.408,95.897 cw(c89.408,95.006) 90.038,95.636 cw(c90.668,96.266) U3.40@89.777,96.266 ; U3.40 91.872,93.802 96.19,93.802 ; JP1.2 96.19,93.802 ; 96.19,93.802 cw(c95.613,93.225) 96.415,93.077 ccw(c95.613,93.225) 96.19,93.802 ; 96.19,93.802 ccw(c96.767,94.379) 96.915,93.577 cw(c96.767,94.379) 96.19,93.802
PC0: JP3.1 U3.22 | length 15.7
  Top Layer w0.254: U3.22@89.408,49.923 cw(c89.408,48.419) 90.472,49.482 cw(c91.535,50.546) U3.22@90.031,50.546 ; U3.22@89.408,50.177 cw(c89.408,49.286) 90.038,49.916 cw(c90.668,50.546) U3.22@89.777,50.546 ; U3.22 90.678,49.276 JP3.1 ; JP3.1@96.587,48.835 ccw(c95.524,47.772) 95.524,49.276 ccw(c95.524,50.78) JP3.1@96.587,49.717 ; JP3.1@96.767,49.015 ccw(c96.137,48.385) 96.137,49.276 ccw(c96.137,50.167) JP3.1@96.767,49.537
PC7: JP3.8 U3.29 | length 15.7
  Top Layer w0.254: U3.29@89.408,67.703 cw(c89.408,66.199) 90.472,67.262 cw(c91.535,68.326) U3.29@90.031,68.326 ; U3.29@89.408,67.957 cw(c89.408,67.066) 90.038,67.696 cw(c90.668,68.326) U3.29@89.777,68.326 ; U3.29 90.678,67.056 JP3.8 ; JP3.8@96.587,66.615 ccw(c95.524,65.552) 95.524,67.056 ccw(c95.524,68.56) JP3.8@96.587,67.497 ; JP3.8@96.767,66.795 ccw(c96.137,66.165) 96.137,67.056 ccw(c96.137,67.947) JP3.8@96.767,67.317
PD0: JP4.9 U3.14 U4.9 | length 58.9
  Top Layer w0.254: JP4.9@66.548,68.973 cw(c66.548,67.469) 67.612,68.532 cw(c68.675,69.596) JP4.9@67.171,69.596 ; JP4.9@66.548,69.227 cw(c66.548,68.336) 67.178,68.966 cw(c67.808,69.596) JP4.9@66.917,69.596 ; JP4.9 72.898,63.246 ; U3.14@73.675,62.865 ccw(c72.898,62.263) 72.898,63.246 ; U3.14@73.675,63.627 cw(c72.898,64.229) 72.898,63.246 ; U3.14@73.876,63.02 ccw(c73.416,62.664) 73.416,63.246 ccw(c73.416,63.828) U3.14@73.876,63.472 ; U3.14 72.898,63.246
  Bottom Layer w0.254: U4.9 62.94,35.559 ; JP4.9@65.925,69.596 cw(c64.421,69.596) 65.484,68.532 cw(c66.548,67.469) JP4.9@66.548,68.973 ; JP4.9@66.179,69.596 cw(c65.288,69.596) 65.918,68.966 cw(c66.548,68.336) JP4.9@66.548,69.227 ; JP4.9 63.195,66.243 63.195,35.814 62.94,35.559 ; 62.94,35.559 cw(c62.94,35.962) 62.58,35.782 ccw(c62.94,35.962) 62.94,35.559 ; 62.94,35.559 ccw(c62.94,35.156) 62.58,35.336 cw(c62.94,35.156) 62.94,35.559
VCC: 1k.1 10k.1 C2.2 C5.1 C7.1 JP7.1 JP7.2 JP7.3 JP7.4 JP51.2 SW.2 U3.10 U4.16 | length 212.8
  Top Layer w1: SW.2 61.595,102.87 61.595,107.823 62.996,109.224 10k.1 70.409,109.224 70.536,109.351 1k.1 ; C5.1 76.022,31.166 86.411,31.166 C7.1 ; JP7.4 JP7.3 JP7.2 JP7.1
  Bottom Layer w1: 60.146,52.525 cw(c61.81,50.861) U4.16@61.81,53.214 ; U4.16 60.96,53.339 59.923,52.302 59.923,34.616 62.146,32.393 70.747,32.393 C5.1 72.771,37.592 C2.2 70.002,46.457 70.002,95.606 67.539,98.069 67.539,101.346 71.881,105.688 ; JP7.4 73.152,110.622 1k.1 71.881,105.688 ; U3.10 75.692,74.93 75.692,97.79 71.881,101.601 71.881,105.688 ; JP7.1 80.772,110.617 JP51.2 ; 60.535,52.914 cw(c61.407,52.043) 61.773,53.22 ccw(c61.407,52.043) 60.535,52.914
pads on no net: J61.1 J61.9 J61.10 J61.11 JP51.3 SW.0 SW.5 U4.11 U4.12 U4.13 U4.14
copper on no net: | length 123.6
  Top Layer w0.254: 42.674,115.569 43.18,117.094 ; 42.797,29.463 43.307,27.94 ; 42.926,117.094 43.434,117.094 ; 43.053,27.94 43.561,27.94 ; 43.231,81.049 43.18,117.094 ; 43.256,63.985 43.307,27.94 ; 43.69,115.571 43.18,117.094 ; 43.813,29.465 43.307,27.94 ; 47.878,119.38 47.88,119.888 ; 49.401,119.119 47.879,119.634 ; 49.405,120.135 47.879,119.634 ; 66.208,119.548 47.879,119.634 ; 83.779,119.466 102.108,119.38 ; 100.582,118.879 102.108,119.38 ; 100.586,119.895 102.108,119.38 ; 102.107,119.126 102.109,119.634

## Polygon pours and split planes (outlines as drawn)
no net on Top Layer (hatched 45Degree grid 0.508 track 0.203): 48.211,30.122 48.211,114.704 49.735,116.228 100.789,116.228 101.932,115.085 101.932,29.741 100.789,28.598 100.662,28.471 49.862,28.471 48.338,29.995
no net on Bottom Layer (hatched 45Degree grid 0.508 track 0.203): 48.338,114.814 48.338,29.978 49.735,28.581 100.789,28.581 101.932,29.724 101.932,115.068 100.789,116.211 49.735,116.211

## Keep-outs
Keep-Out Layer:
  lines w0.6: 47.625,29.591 47.625,115.316 ; 49.149,27.94 101.092,27.94 ; 49.276,116.84 100.965,116.84 ; 102.489,29.464 102.489,115.316

## Other copper
Top Layer:
  text "54.2296 (mm)" at 66.458,118.633 h1.52 r359.73
  text "89.1541 (mm)" at 42.318,80.793 h1.52 r270.08

## Silkscreen, mask and mechanical layers (free items; w line width, h text height)
Top Overlay:
  text "AGND" at 91.44,115.189 h0.9
  text "AVcc" at 83.566,115.062 h0.9
  text "AREF" at 87.503,115.062 h0.9
  text "GND" at 63.5,114.935 h1.12
  text "+5V" at 75.565,114.935 h1.12
  text "VCC" at 50.927,108.204 h1.22
  text "GND" at 30.607,96.774 h1.12
  text "GND" at 50.927,94.996 h1.22
  text "GND" at 68.707,94.996 h1.12
  text "GND" at 91.821,94.996 h1.12
  text "PC0" at 30.734,94.361 h1.12
  text "PB0" at 68.834,92.583 h1.12
  text "PA0" at 91.948,92.583 h1.12
  text "PC1" at 30.734,91.567 h1.12
  text "PB1" at 68.834,89.789 h1.12
  text "PA1" at 91.948,89.789 h1.12
  text "PC2" at 30.734,89.027 h1.12
  text "PB2" at 68.834,87.249 h1.12
  text "PA2" at 91.948,87.249 h1.12
  text "PC3" at 30.734,86.614 h1.12
  text "PB3" at 68.834,84.836 h1.12
  text "PA3" at 91.948,84.836 h1.12
  text "PC4" at 30.734,84.074 h1.12
  text "PB4" at 68.834,82.296 h1.12
  text "PA4" at 91.948,82.296 h1.12
  text "PC5" at 30.734,81.534 h1.12
  text "PB5" at 68.834,79.756 h1.12
  text "PA5" at 91.948,79.756 h1.12
  text "PC6" at 30.734,78.994 h1.12
  text "PB6" at 68.834,77.216 h1.12
  text "PA6" at 91.948,77.216 h1.12
  text "ATMEGA16  V3.1" at 82.55,76.835 h1.52 r90
  text "PC7" at 30.734,76.2 h1.12
  text "PB7" at 68.834,74.422 h1.12
  text "PA7" at 91.948,74.422 h1.12
  text "GND" at 91.821,69.088 h1.12
  text "PD0" at 68.707,68.961 h1.12
  text "PC7" at 91.821,66.421 h1.12
  text "PD1" at 68.707,66.167 h1.12
  text "PC6" at 91.821,64.008 h1.12
  text "PD2" at 68.707,63.627 h1.12
  text "PC5" at 91.821,61.595 h1.12
  text "PD3" at 68.707,61.214 h1.12
  text "PC4" at 91.948,58.928 h1.12
  text "PD4" at 68.707,58.674 h1.12
  text "PC3" at 91.948,56.388 h1.12
  text "PD5" at 68.707,56.134 h1.12
  text "CTS" at 49.022,54.864 h1.02
  text "PC2" at 91.821,53.848 h1.12
  text "PD6" at 68.707,53.594 h1.12
  text "PC1" at 91.948,51.435 h1.12
  text "PD7" at 68.707,50.8 h1.12
  text "PC0" at 91.948,48.768 h1.12
  text "GND" at 68.58,48.387 h1.12
  text "RTS" at 48.895,46.355 h1.02
  text "DSR" at 48.895,44.323 h1.02
  text "DTR" at 48.768,36.449 h1.02
Mechanical 1:
  lines w0.254: 47.625,115.316 47.752,115.316
  lines w0.6: 47.625,29.591 49.149,28.067 ; 47.752,115.316 49.276,116.84 ; 100.965,27.94 102.489,29.464 ; 100.965,116.84 102.489,115.316

## Text inside footprints (layer, text, board x,y; h text height)
J61: Top Overlay "6" at 53.235,71.037 h1.5 r90; Top Overlay "9" at 53.235,79.347 h1.5 r90; Top Overlay "5" at 62.635,80.732 h1.5 r90; Top Overlay "1" at 62.635,69.902 h1.5 r90
JP51: Top Overlay "10" at 96.52,106.045 h1.27; Top Overlay "9" at 96.52,103.505 h1.27; Top Overlay "1" at 82.804,103.505 h1.27; Top Overlay "2" at 82.296,106.045 h1.27